# Altium PCB Sinistro_ASP_RevA.PcbDoc (part 4 of 5)
Units mm, origin at the board's own origin, x right, y up, seen from the top; angles counter-clockwise.
Board outline 150 x 110 mm, 8 copper layers (Top Layer (.GTL), MidLayer1 (.G1), +28V and VCC (.GP1), A and D grounds (.GP2), Earth GND (.GP3), +5ANA (.GP4), -5ANA (.GP5), Bottom Layer (.GBL)); 383 components, 275 nets, 1751 pads, 521 vias.
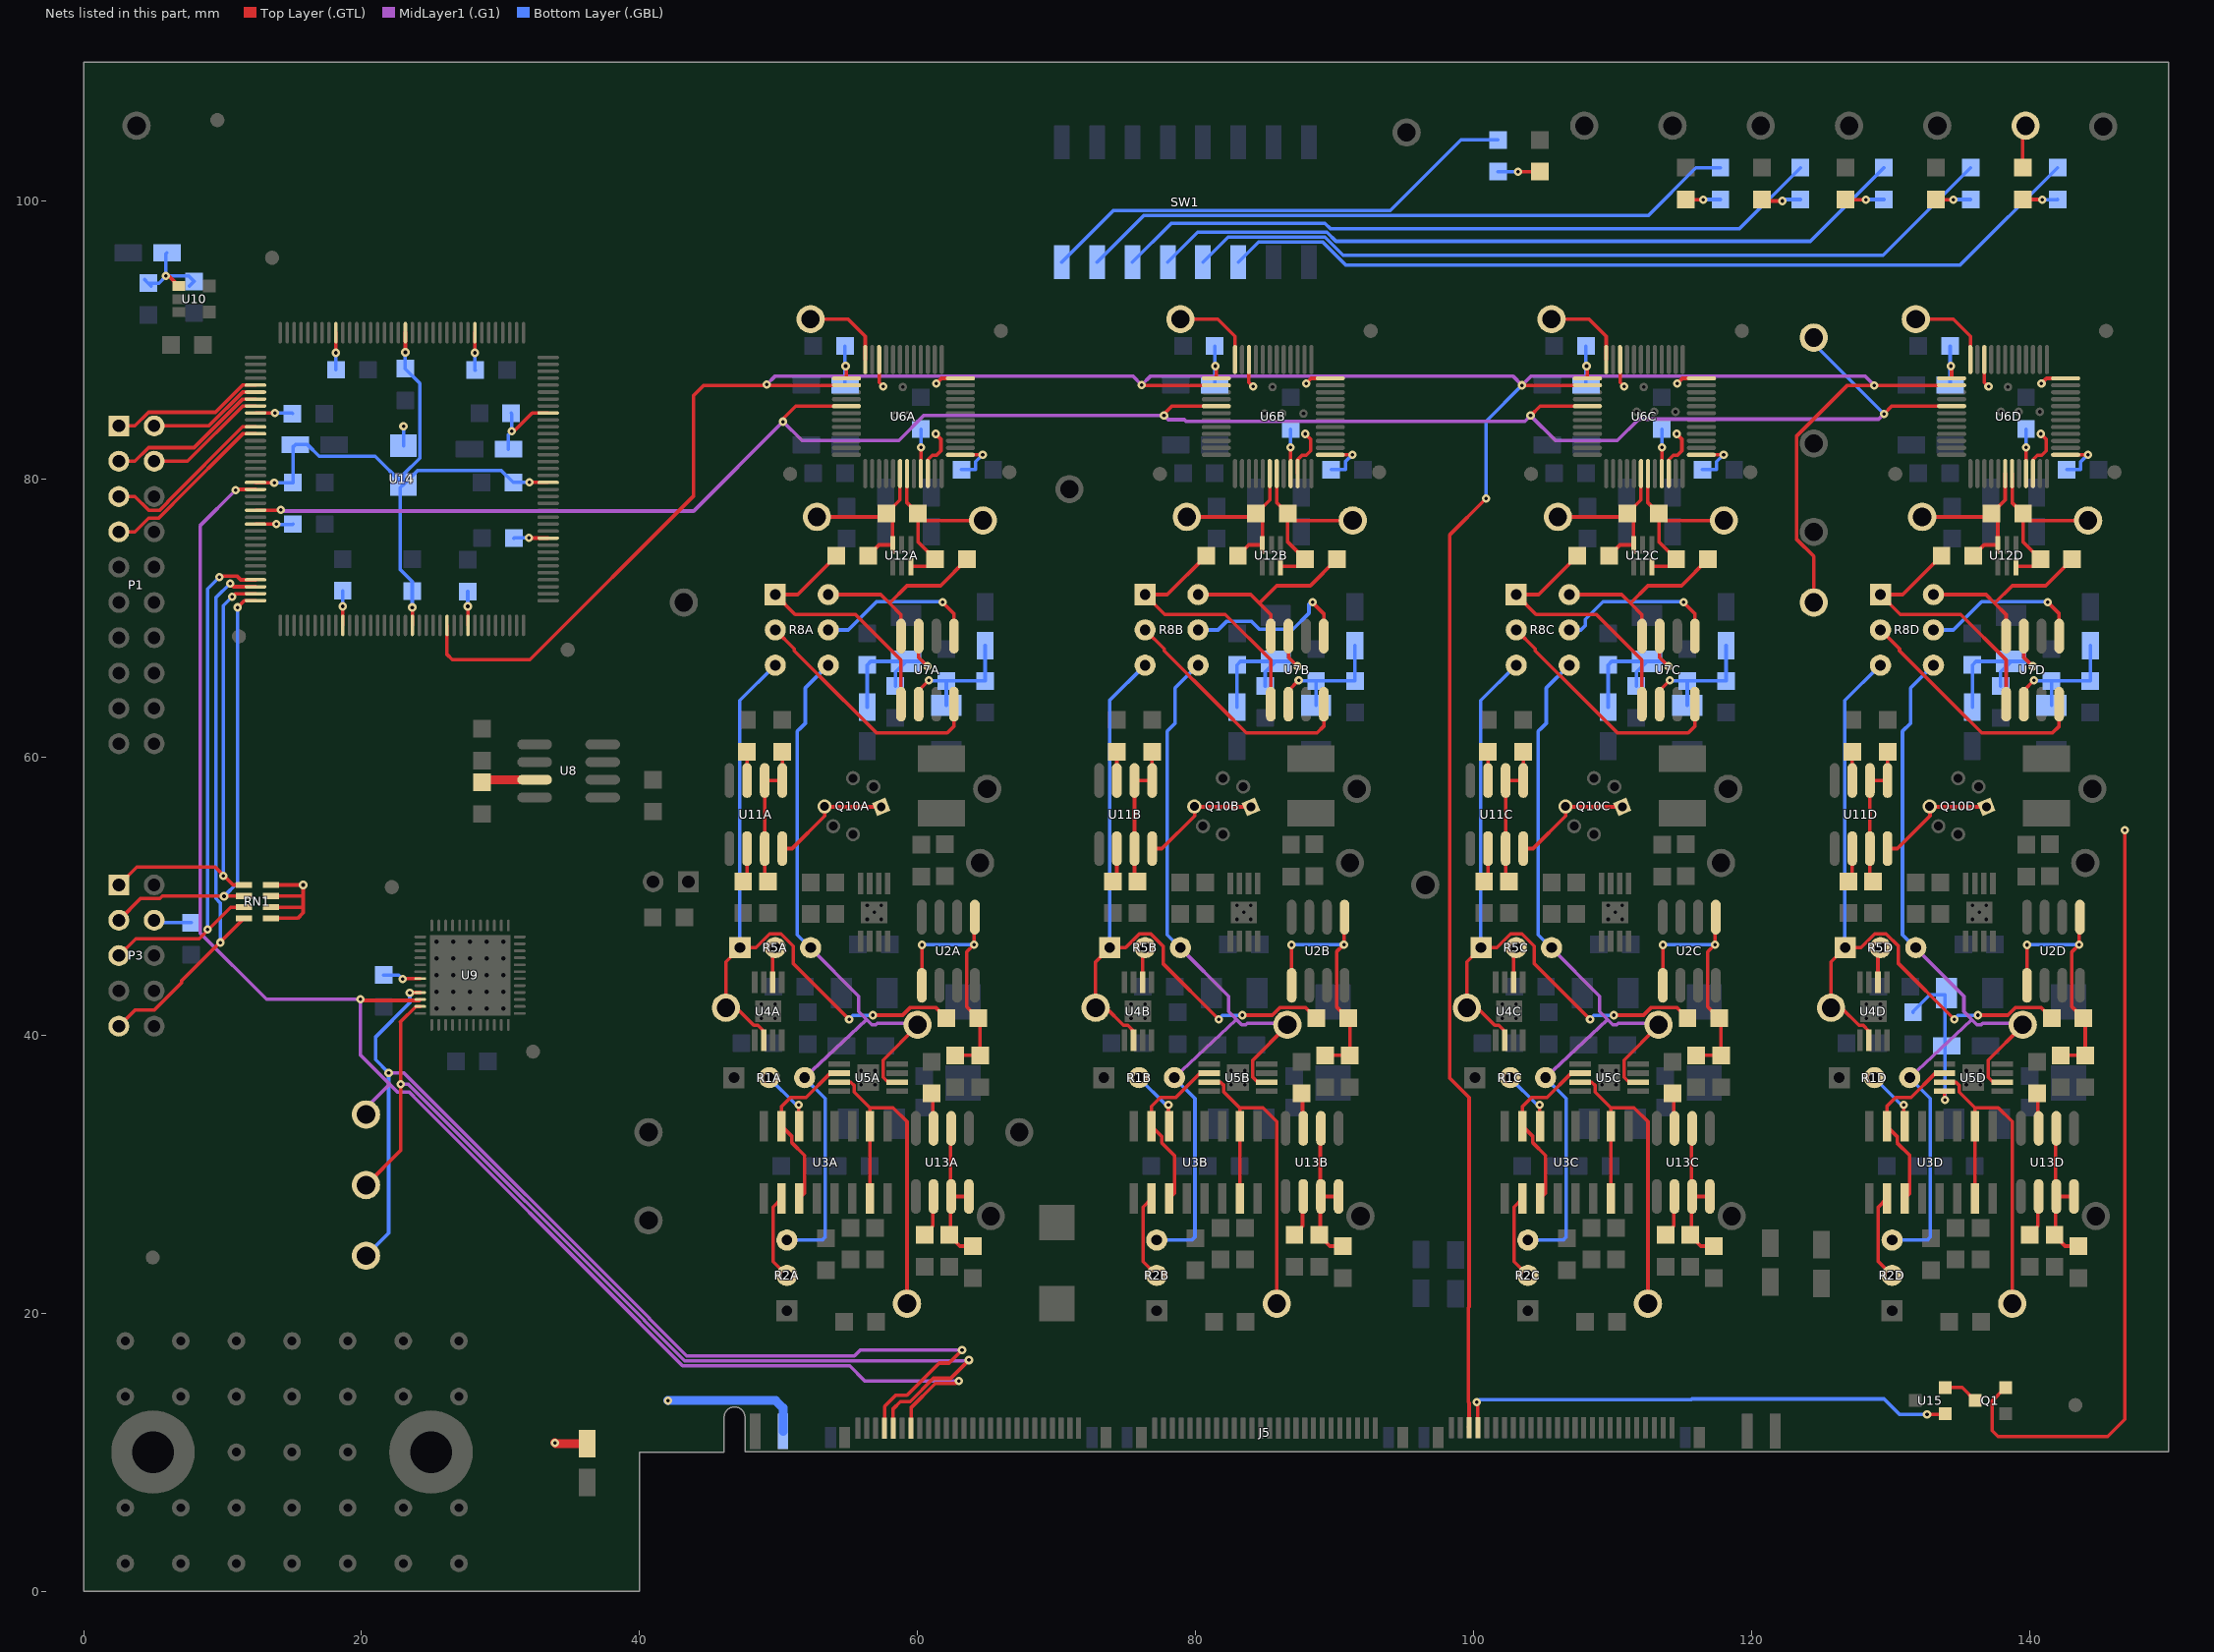
[diagram p10: the nets of this part, all layers, seen from the top]

## Via types
v1: diameter 0.61, hole 0.254, Top Layer (.GTL) to Bottom Layer (.GBL), 521 vias

## Nets (pads, with @x,y where several pads share a name; then routed paths per layer and width w, separated by ;. In a path a pad name is that pad's centre, name@x,y a point inside that pad or via, vN(x,y) a via of type N, cw(c..) or ccw(c..) an arc to the next point about the centre after c; other vN are vias at no path point) (continued)
NetC13D_2: C13D.2 C15D.2 L2D.1 U5D.4 | length 11.1
  Top Layer (.GTL) w0.254: U5D.4@133.866,35.965 133.866,35.383 v1(133.909,35.34)
  Bottom Layer (.GBL) w0.254: C13D.2@131.605,41.632 131.605,41.708 132.798,42.902 133.891,42.902 v1@133.891,35.333
NetC16A_1: C16A.1 C18A.1 C19A.1 L3A.2 U7A.3 | length 12.1
  Top Layer (.GTL) w0.254: U7A.3@60.073,68.701 60.073,67.166 v1(60.708,66.531)
  Bottom Layer (.GBL) w0.254: C16A.1@56.372,63.578 C19A.1@56.372,66.626 56.626,66.88 L3A.2@59.166,66.88 ; C18A.1@58.404,65.102 58.404,66.118 L3A.2@59.166,66.88 ; v1@60.69,66.524 60.334,66.88 L3A.2@59.166,66.88
NetC16B_1: C16B.1 C18B.1 C19B.1 L3B.2 U7B.3 | length 12.1
  Top Layer (.GTL) w0.254: U7B.3@86.673,68.701 86.673,67.166 v1(87.308,66.531)
  Bottom Layer (.GBL) w0.254: C16B.1@82.972,63.578 C19B.1@82.972,66.626 83.226,66.88 L3B.2@85.766,66.88 ; C18B.1@85.004,65.102 85.004,66.118 L3B.2@85.766,66.88 ; v1@87.29,66.524 86.934,66.88 L3B.2@85.766,66.88
NetC16C_1: C16C.1 C18C.1 C19C.1 L3C.2 U7C.3 | length 12.1
  Top Layer (.GTL) w0.254: U7C.3@113.373,68.701 113.373,67.166 v1(114.008,66.531)
  Bottom Layer (.GBL) w0.254: C16C.1@109.672,63.578 C19C.1@109.672,66.626 109.926,66.88 L3C.2@112.466,66.88 ; C18C.1@111.704,65.102 111.704,66.118 L3C.2@112.466,66.88 ; v1@113.99,66.524 113.634,66.88 L3C.2@112.466,66.88
NetC16D_1: C16D.1 C18D.1 C19D.1 L3D.2 U7D.3 | length 12.1
  Top Layer (.GTL) w0.254: U7D.3@139.573,68.701 139.573,67.166 v1(140.208,66.531)
  Bottom Layer (.GBL) w0.254: C16D.1@135.872,63.578 C19D.1@135.872,66.626 136.126,66.88 L3D.2@138.666,66.88 ; C18D.1@137.904,65.102 137.904,66.118 L3D.2@138.666,66.88 ; v1@140.19,66.524 139.834,66.88 L3D.2@138.666,66.88
NetC17A_2: C17A.2 R14A.1 U13A.2 U13A.7 U13A.8 | length 11.1
  Top Layer (.GTL) w0.254: U13A.2@62.359,33.294 U13A.7@62.359,28.394 ; U13A.8@63.629,28.394 U13A.7@62.359,28.394 ; C17A.2@63.985,24.824 63.045,24.824 62.232,25.637 62.359,25.764 U13A.7@62.359,28.394
NetC17B_2: C17B.2 R14B.1 U13B.2 U13B.7 U13B.8 | length 11.1
  Top Layer (.GTL) w0.254: U13B.2@88.959,33.294 U13B.7@88.959,28.394 ; U13B.8@90.229,28.394 U13B.7@88.959,28.394 ; C17B.2@90.585,24.824 89.645,24.824 88.832,25.637 88.959,25.764 U13B.7@88.959,28.394
NetC17C_2: C17C.2 R14C.1 U13C.2 U13C.7 U13C.8 | length 11.1
  Top Layer (.GTL) w0.254: U13C.2@115.659,33.294 U13C.7@115.659,28.394 ; U13C.8@116.929,28.394 U13C.7@115.659,28.394 ; C17C.2@117.285,24.824 116.345,24.824 115.532,25.637 115.659,25.764 U13C.7@115.659,28.394
NetC17D_2: C17D.2 R14D.1 U13D.2 U13D.7 U13D.8 | length 11.1
  Top Layer (.GTL) w0.254: U13D.2@141.859,33.294 U13D.7@141.859,28.394 ; U13D.8@143.129,28.394 U13D.7@141.859,28.394 ; C17D.2@143.485,24.824 142.545,24.824 141.732,25.637 141.859,25.764 U13D.7@141.859,28.394
NetC22A_2: C22A.2 U6A.9 | length 3.2
  Top Layer (.GTL) w0.254: U6A.9@60.231,80.389 v1(60.231,82.284)
  Bottom Layer (.GBL) w0.254: v1@60.213,82.277 60.233,82.297 C22A.2@60.233,83.593
NetC22B_2: C22B.2 U6B.9 | length 3.2
  Top Layer (.GTL) w0.254: U6B.9@86.831,80.389 v1(86.831,82.284)
  Bottom Layer (.GBL) w0.254: v1@86.813,82.277 86.833,82.297 C22B.2@86.833,83.593
NetC22C_2: C22C.2 U6C.9 | length 3.2
  Top Layer (.GTL) w0.254: U6C.9@113.531,80.389 v1(113.531,82.284)
  Bottom Layer (.GBL) w0.254: v1@113.513,82.277 113.533,82.297 C22C.2@113.533,83.593
NetC22D_2: C22D.2 U6D.9 | length 3.2
  Top Layer (.GTL) w0.254: U6D.9@139.731,80.389 v1(139.731,82.284)
  Bottom Layer (.GBL) w0.254: v1@139.713,82.277 139.733,82.297 C22D.2@139.733,83.593
NetC23A_2: C23A.2 U6A.13 | length 4.4
  Top Layer (.GTL) w0.254: U6A.13@63.081,81.739 v1(64.678,81.739)
  Bottom Layer (.GBL) w0.254: C23A.2@63.636,80.672 C23A.2@63.154,80.672 64.17,80.672 64.17,81.242 v1@64.659,81.732
NetC23B_2: C23B.2 U6B.13 | length 4.4
  Top Layer (.GTL) w0.254: U6B.13@89.681,81.739 v1(91.278,81.739)
  Bottom Layer (.GBL) w0.254: C23B.2@90.236,80.672 C23B.2@89.754,80.672 90.77,80.672 90.77,81.242 v1@91.259,81.732
NetC23C_2: C23C.2 U6C.13 | length 4.4
  Top Layer (.GTL) w0.254: U6C.13@116.381,81.739 v1(117.978,81.739)
  Bottom Layer (.GBL) w0.254: C23C.2@116.936,80.672 C23C.2@116.454,80.672 117.47,80.672 117.47,81.242 v1@117.959,81.732
NetC23D_2: C23D.2 U6D.13 | length 4.4
  Top Layer (.GTL) w0.254: U6D.13@142.581,81.739 v1(144.178,81.739)
  Bottom Layer (.GBL) w0.254: C23D.2@143.136,80.672 C23D.2@142.654,80.672 143.67,80.672 143.67,81.242 v1@144.159,81.732
NetC26A_1: C26A.1 C28A.1 C31A.2 L4A.2 U7A.6 | length 10.4
  Top Layer (.GTL) w0.254: U7A.6@60.073,63.801 60.073,64.778 v1(60.81,65.515)
  Bottom Layer (.GBL) w0.254: v1@60.791,65.508 60.817,65.483 C28A.1@62.061,65.483 ; L4A.2@62.061,63.705 C28A.1@62.061,65.483 ; C31A.2@64.855,68.023 C26A.1@64.855,65.483 C28A.1@62.061,65.483
NetC26B_1: C26B.1 C28B.1 C31B.2 L4B.2 U7B.6 | length 10.4
  Top Layer (.GTL) w0.254: U7B.6@86.673,63.801 86.673,64.778 v1(87.41,65.515)
  Bottom Layer (.GBL) w0.254: v1@87.391,65.508 87.417,65.483 C28B.1@88.661,65.483 ; L4B.2@88.661,63.705 C28B.1@88.661,65.483 ; C31B.2@91.455,68.023 C26B.1@91.455,65.483 C28B.1@88.661,65.483
NetC26C_1: C26C.1 C28C.1 C31C.2 L4C.2 U7C.6 | length 10.4
  Top Layer (.GTL) w0.254: U7C.6@113.373,63.801 113.373,64.778 v1(114.11,65.515)
  Bottom Layer (.GBL) w0.254: v1@114.091,65.508 114.117,65.483 C28C.1@115.361,65.483 ; L4C.2@115.361,63.705 C28C.1@115.361,65.483 ; C31C.2@118.155,68.023 C26C.1@118.155,65.483 C28C.1@115.361,65.483
NetC26D_1: C26D.1 C28D.1 C31D.2 L4D.2 U7D.6 | length 10.4
  Top Layer (.GTL) w0.254: U7D.6@139.573,63.801 139.573,64.778 v1(140.31,65.515)
  Bottom Layer (.GBL) w0.254: v1@140.291,65.508 140.317,65.483 C28D.1@141.561,65.483 ; L4D.2@141.561,63.705 C28D.1@141.561,65.483 ; C31D.2@144.355,68.023 C26D.1@144.355,65.483 C28D.1@141.561,65.483
NetC40_2: C40.2 C41.2 C42.2 C43.2 C45.1 L5.1 U14.19 U14.56 U14.90 U14.126 | length 48.1
  Top Layer (.GTL) w0.254: U14.19@12.375,79.75 12.394,79.731 v1(13.716,79.731) ; v1(23.15,89.114) U14.126@23.15,90.525 ; v1(23.647,70.764) 23.65,70.762 U14.56@23.65,69.475 ; v1@32.086,79.75 v1(32.08,79.756) 33.419,79.756 U14.90@33.425,79.75
  Bottom Layer (.GBL) w0.254: v1(13.716,79.731) C40.2@15.062,79.731 15.062,82.296 C45.1@15.24,82.474 16.11,82.474 16.949,81.636 20.98,81.636 L5.1@23.012,79.604 ; v1(23.15,89.114) 23.139,89.103 C41.2@23.139,87.935 24.194,86.881 24.194,81.503 23.012,80.322 L5.1@23.012,79.604 ; v1(23.647,70.764) C42.2@23.647,71.933 23.647,72.625 22.784,73.489 22.784,79.375 L5.1@23.012,79.604 ; v1(32.08,79.756) C43.2@30.912,79.756 30.048,80.62 24.028,80.62 L5.1@23.012,79.604
NetC46A_2: C46A.2 R12A.2 U11A.1 U11A.2 U11A.7 | length 11.8
  Top Layer (.GTL) w0.254: U11A.7@48.999,52.307 U11A.7@48.999,53.413 ; C46A.2@49.228,51.062 48.999,51.291 U11A.7@48.999,53.413 ; R12A.2@50.269,60.384 U11A.1@50.269,58.313 U11A.2@48.999,58.313 U11A.7@48.999,53.413
NetC46B_2: C46B.2 R12B.2 U11B.1 U11B.2 U11B.7 | length 11.8
  Top Layer (.GTL) w0.254: U11B.7@75.599,52.307 U11B.7@75.599,53.413 ; C46B.2@75.828,51.062 75.599,51.291 U11B.7@75.599,53.413 ; R12B.2@76.869,60.384 U11B.1@76.869,58.313 U11B.2@75.599,58.313 U11B.7@75.599,53.413
NetC46C_2: C46C.2 R12C.2 U11C.1 U11C.2 U11C.7 | length 11.8
  Top Layer (.GTL) w0.254: U11C.7@102.299,52.307 U11C.7@102.299,53.413 ; C46C.2@102.528,51.062 102.299,51.291 U11C.7@102.299,53.413 ; R12C.2@103.569,60.384 U11C.1@103.569,58.313 U11C.2@102.299,58.313 U11C.7@102.299,53.413
NetC46D_2: C46D.2 R12D.2 U11D.1 U11D.2 U11D.7 | length 11.8
  Top Layer (.GTL) w0.254: U11D.7@128.499,52.307 U11D.7@128.499,53.413 ; C46D.2@128.728,51.062 128.499,51.291 U11D.7@128.499,53.413 ; R12D.2@129.769,60.384 U11D.1@129.769,58.313 U11D.2@128.499,58.313 U11D.7@128.499,53.413
NetC49A_1: C49A.1 R18A.2 TP6A.1 U6A.6 U12A.6 | length 12.9
  Top Layer (.GTL) w0.254: TP6A.1@52.758,77.275 57.508,77.275 C49A.1@57.737,77.504 ; R18A.2@56.441,74.481 57.216,75.256 U12A.6@58.204,75.256 58.204,77.036 C49A.1@57.737,77.504 ; U6A.6@58.731,80.389 58.731,78.498 C49A.1@57.737,77.504
NetC49A_2: C49A.2 R19A.2 TP7A.1 U6A.7 U12A.3 | length 13.9
  Top Layer (.GTL) w0.254: U6A.7@59.231,80.389 59.231,78.295 C49A.2@60.023,77.504 ; U12A.3@59.504,73.706 60.746,73.706 R19A.2@61.267,74.227 60.023,75.472 C49A.2@60.023,77.504 ; TP7A.1@64.696,77.021 60.505,77.021 C49A.2@60.023,77.504
NetC49B_1: C49B.1 R18B.2 TP6B.1 U6B.6 U12B.6 | length 12.9
  Top Layer (.GTL) w0.254: TP6B.1@79.358,77.275 84.108,77.275 C49B.1@84.337,77.504 ; R18B.2@83.041,74.481 83.816,75.256 U12B.6@84.804,75.256 84.804,77.036 C49B.1@84.337,77.504 ; U6B.6@85.331,80.389 85.331,78.498 C49B.1@84.337,77.504
NetC49B_2: C49B.2 R19B.2 TP7B.1 U6B.7 U12B.3 | length 13.9
  Top Layer (.GTL) w0.254: U6B.7@85.831,80.389 85.831,78.295 C49B.2@86.623,77.504 ; U12B.3@86.104,73.706 87.346,73.706 R19B.2@87.867,74.227 86.623,75.472 C49B.2@86.623,77.504 ; TP7B.1@91.296,77.021 87.105,77.021 C49B.2@86.623,77.504
NetC49C_1: C49C.1 R18C.2 TP6C.1 U6C.6 U12C.6 | length 12.9
  Top Layer (.GTL) w0.254: TP6C.1@106.058,77.275 110.808,77.275 C49C.1@111.037,77.504 ; R18C.2@109.741,74.481 110.516,75.256 U12C.6@111.504,75.256 111.504,77.036 C49C.1@111.037,77.504 ; U6C.6@112.031,80.389 112.031,78.498 C49C.1@111.037,77.504
NetC49C_2: C49C.2 R19C.2 TP7C.1 U6C.7 U12C.3 | length 13.9
  Top Layer (.GTL) w0.254: U6C.7@112.531,80.389 112.531,78.295 C49C.2@113.323,77.504 ; U12C.3@112.804,73.706 114.046,73.706 R19C.2@114.567,74.227 113.323,75.472 C49C.2@113.323,77.504 ; TP7C.1@117.996,77.021 113.805,77.021 C49C.2@113.323,77.504
NetC49D_1: C49D.1 R18D.2 TP6D.1 U6D.6 U12D.6 | length 12.9
  Top Layer (.GTL) w0.254: TP6D.1@132.258,77.275 137.008,77.275 C49D.1@137.237,77.504 ; R18D.2@135.941,74.481 136.716,75.256 U12D.6@137.704,75.256 137.704,77.036 C49D.1@137.237,77.504 ; U6D.6@138.231,80.389 138.231,78.498 C49D.1@137.237,77.504
NetC49D_2: C49D.2 R19D.2 TP7D.1 U6D.7 U12D.3 | length 13.9
  Top Layer (.GTL) w0.254: U6D.7@138.731,80.389 138.731,78.295 C49D.2@139.523,77.504 ; U12D.3@139.004,73.706 140.246,73.706 R19D.2@140.767,74.227 139.523,75.472 C49D.2@139.523,77.504 ; TP7D.1@144.196,77.021 140.005,77.021 C49D.2@139.523,77.504
NetC61_2: C61.2 U8.3 | length 3.8
  Top Layer (.GTL) w0.635: C61.2@28.677,58.191 28.854,58.369 U8.3@32.45,58.369
NetD1_ANOD: D1.ANOD R25.2 | length 2.7
  Top Layer (.GTL) w0.254: D1.ANOD@120.857,100 v1(122.2,100)
  Bottom Layer (.GBL) w0.254: v1(122.2,100) 122.307,100.107 R25.2@123.5,100.107
NetD2_ANOD: D2.ANOD R26.2 | length 2.5
  Top Layer (.GTL) w0.254: D2.ANOD@133.257,100.1 v1(134.5,100.1)
  Bottom Layer (.GBL) w0.254: v1(134.5,100.1) 134.507,100.107 R26.2@135.75,100.107
NetD3_CATH: D3.CATH R22.2 | length 3
  Top Layer (.GTL) w0.254: v1(103.2,102.1) 103.207,102.107 D3.CATH@104.75,102.107
  Bottom Layer (.GBL) w0.254: R22.2@101.75,102.107 103.193,102.107 v1(103.2,102.1)
NetD4_CATH: D4.CATH R23.2 | length 2.5
  Top Layer (.GTL) w0.254: D4.CATH@115.25,100.107 115.257,100.1 v1(116.5,100.1)
  Bottom Layer (.GBL) w0.254: v1(116.5,100.1) 116.507,100.107 R23.2@117.75,100.107
NetD5_CATH: D5.CATH R24.2 | length 2.7
  Top Layer (.GTL) w0.254: D5.CATH@126.757,100.1 v1(128.2,100.1)
  Bottom Layer (.GBL) w0.254: v1(128.2,100.1) 128.207,100.107 R24.2@129.5,100.107
NetD6_CATH: D6.CATH R27.2 | length 2.5
  Top Layer (.GTL) w0.254: D6.CATH@139.5,100.107 140.893,100.107 v1(140.9,100.1)
  Bottom Layer (.GBL) w0.254: v1(140.9,100.1) 141.993,100.1 R27.2@142,100.107
NetQ1_3: Q1.3 U15.2 | length 2.5
  Top Layer (.GTL) w0.254: U15.2@133.934,14.656 135.128,14.656 Q1.3@136.068,13.716
NetQ10A_1: Q10A.1 Q10A.5 U11A.8 | length 8.8
  Top Layer (.GTL) w0.254: U11A.8@50.318,53.413 U11A.8@50.269,53.413 50.969,53.413 53.327,55.771 53.327,56.422 Q10A.1@57.381,56.422
NetQ10B_1: Q10B.1 Q10B.5 U11B.8 | length 8.8
  Top Layer (.GTL) w0.254: U11B.8@76.918,53.413 U11B.8@76.869,53.413 77.569,53.413 79.927,55.771 79.927,56.422 Q10B.1@83.981,56.422
NetQ10C_1: Q10C.1 Q10C.5 U11C.8 | length 8.8
  Top Layer (.GTL) w0.254: U11C.8@103.618,53.413 U11C.8@103.569,53.413 104.269,53.413 106.627,55.771 106.627,56.422 Q10C.1@110.681,56.422
NetQ10D_1: Q10D.1 Q10D.5 U11D.8 | length 8.8
  Top Layer (.GTL) w0.254: U11D.8@129.818,53.413 U11D.8@129.769,53.413 130.469,53.413 132.827,55.771 132.827,56.422 Q10D.1@136.881,56.422
NetR1A_2: R1A.2 U3A.6 | length 4.4
  Top Layer (.GTL) w0.254: U3A.6@51.437,33.495 v1(51.437,34.984)
  Bottom Layer (.GBL) w0.254: R1A.2@49.311,36.933 51.266,34.977 v1@51.419,34.977
NetR1A_3: R1A.3 R2A.3 R5A.3 R8A.4 TP3A.1 U5A.6 | length 59.4
  Top Layer (.GTL) w0.254: U5A.6@58.516,36.615 57.868,36.615 57.513,36.97 57.513,38.209 59.997,40.694 TP3A.1@59.997,40.75
  MidLayer1 (.G1) w0.254: R1A.3@51.851,36.933 56.3,41.1 ; R5A.3@52.282,46.28 55.762,42.8 55.762,41.69 56.71,40.743 57.001,40.743 57.109,40.851 59.87,40.851 TP3A.1@59.979,40.743
  Bottom Layer (.GBL) w0.254: R2A.3@50.581,25.249 53.121,25.249 53.349,25.478 53.349,35.434 R1A.3@51.851,36.933 ; R5A.3@52.282,46.28 51.343,47.22 51.343,61.858 51.596,62.111 51.608,62.111 51.92,62.424 51.92,64.968 R8A.4@53.552,66.6
  other v1: 53.571,66.607
NetR1B_2: R1B.2 U3B.6 | length 4.4
  Top Layer (.GTL) w0.254: U3B.6@78.037,33.495 v1(78.037,34.984)
  Bottom Layer (.GBL) w0.254: R1B.2@75.911,36.933 77.866,34.977 v1@78.019,34.977
NetR1B_3: R1B.3 R2B.3 R5B.3 R8B.4 TP3B.1 U5B.6 | length 59.4
  Top Layer (.GTL) w0.254: U5B.6@85.116,36.615 84.468,36.615 84.113,36.97 84.113,38.209 86.597,40.694 TP3B.1@86.597,40.75
  MidLayer1 (.G1) w0.254: R1B.3@78.451,36.933 82.9,41.1 ; R5B.3@78.882,46.28 82.362,42.8 82.362,41.69 83.31,40.743 83.601,40.743 83.709,40.851 86.47,40.851 TP3B.1@86.579,40.743
  Bottom Layer (.GBL) w0.254: R2B.3@77.181,25.249 79.721,25.249 79.949,25.478 79.949,35.434 R1B.3@78.451,36.933 ; R5B.3@78.882,46.28 77.943,47.22 77.943,61.858 78.196,62.111 78.208,62.111 78.52,62.424 78.52,64.968 R8B.4@80.152,66.6
NetR1C_2: R1C.2 U3C.6 | length 4.4
  Top Layer (.GTL) w0.254: U3C.6@104.737,33.495 v1(104.737,34.984)
  Bottom Layer (.GBL) w0.254: R1C.2@102.611,36.933 104.566,34.977 v1@104.719,34.977
NetR1C_3: R1C.3 R2C.3 R5C.3 R8C.4 TP3C.1 U5C.6 | length 59.4
  Top Layer (.GTL) w0.254: U5C.6@111.816,36.615 111.168,36.615 110.813,36.97 110.813,38.209 113.297,40.694 TP3C.1@113.297,40.75
  MidLayer1 (.G1) w0.254: R1C.3@105.151,36.933 109.6,41.1 ; R5C.3@105.582,46.28 109.062,42.8 109.062,41.69 110.01,40.743 110.301,40.743 110.409,40.851 113.17,40.851 TP3C.1@113.279,40.743
  Bottom Layer (.GBL) w0.254: R2C.3@103.881,25.249 106.421,25.249 106.649,25.478 106.649,35.434 R1C.3@105.151,36.933 ; R5C.3@105.582,46.28 104.643,47.22 104.643,61.858 104.896,62.111 104.908,62.111 105.22,62.424 105.22,64.968 R8C.4@106.852,66.6
NetR1D_2: R1D.2 U3D.6 | length 4.4
  Top Layer (.GTL) w0.254: U3D.6@130.937,33.495 v1(130.937,34.984)
  Bottom Layer (.GBL) w0.254: R1D.2@128.811,36.933 130.766,34.977 v1@130.919,34.977
NetR1D_3: R1D.3 R2D.3 R5D.3 R8D.4 TP3D.1 U5D.6 | length 59.4
  Top Layer (.GTL) w0.254: U5D.6@138.016,36.615 137.368,36.615 137.013,36.97 137.013,38.209 139.497,40.694 TP3D.1@139.497,40.75
  MidLayer1 (.G1) w0.254: R1D.3@131.351,36.933 135.8,41.1 ; R5D.3@131.782,46.28 135.262,42.8 135.262,41.69 136.21,40.743 136.501,40.743 136.609,40.851 139.37,40.851 TP3D.1@139.479,40.743
  Bottom Layer (.GBL) w0.254: R2D.3@130.081,25.249 132.621,25.249 132.849,25.478 132.849,35.434 R1D.3@131.351,36.933 ; R5D.3@131.782,46.28 130.843,47.22 130.843,61.858 131.096,62.111 131.108,62.111 131.42,62.424 131.42,64.968 R8D.4@133.052,66.6
NetR2A_2: R2A.2 U3A.10 | length 6.2
  Top Layer (.GTL) w0.254: U3A.10@50.218,28.244 49.609,27.634 49.609,23.706 R2A.2@50.599,22.716
NetR2B_2: R2B.2 U3B.10 | length 6.2
  Top Layer (.GTL) w0.254: U3B.10@76.818,28.244 76.209,27.634 76.209,23.706 R2B.2@77.199,22.716
NetR2C_2: R2C.2 U3C.10 | length 6.2
  Top Layer (.GTL) w0.254: U3C.10@103.518,28.244 102.909,27.634 102.909,23.706 R2C.2@103.899,22.716
NetR2D_2: R2D.2 U3D.10 | length 6.2
  Top Layer (.GTL) w0.254: U3D.10@129.718,28.244 129.109,27.634 129.109,23.706 R2D.2@130.099,22.716
NetR5A_1: R5A.1 R8A.3 R9A.2 TP4A.1 U4A.6 | length 49.4
  Top Layer (.GTL) w0.254: U4A.6@48.928,39.64 48.928,40.288 48.515,40.701 48.213,40.701 46.946,41.969 TP4A.1@46.205,41.969 46.205,45.271 R5A.1@47.221,46.287 48.36,46.287 49.351,47.278 50.171,47.278 51.056,46.393 51.056,45.144 v1(55.07,41.131) ; v1(56.771,41.436) 58.923,41.436 59.482,41.994 61.293,41.994 R9A.2@62.08,41.207
  Bottom Layer (.GBL) w0.254: R5A.1@47.202,46.28 47.202,64.06 R8A.3@49.742,66.6 ; v1@55.051,41.124 55.356,41.429 v1@56.753,41.429
  other v1: 49.761,66.607
NetR5A_2: R5A.2 U4A.2 | length 2.6
  Top Layer (.GTL) w0.254: U4A.2@49.578,43.79 49.578,46.104 R5A.2@49.761,46.287
NetR5B_1: R5B.1 R8B.3 R9B.2 TP4B.1 U4B.6 | length 49.4
  Top Layer (.GTL) w0.254: U4B.6@75.528,39.64 75.528,40.288 75.115,40.701 74.813,40.701 73.546,41.969 TP4B.1@72.805,41.969 72.805,45.271 R5B.1@73.821,46.287 74.96,46.287 75.951,47.278 76.771,47.278 77.656,46.393 77.656,45.144 v1(81.67,41.131) ; v1(83.371,41.436) 85.523,41.436 86.082,41.994 87.893,41.994 R9B.2@88.68,41.207
  Bottom Layer (.GBL) w0.254: R5B.1@73.802,46.28 73.802,64.06 R8B.3@76.342,66.6 ; v1@81.651,41.124 81.956,41.429 v1@83.353,41.429
NetR5B_2: R5B.2 U4B.2 | length 2.6
  Top Layer (.GTL) w0.254: U4B.2@76.178,43.79 76.178,46.104 R5B.2@76.361,46.287
NetR5C_1: R5C.1 R8C.3 R9C.2 TP4C.1 U4C.6 | length 49.4
  Top Layer (.GTL) w0.254: U4C.6@102.228,39.64 102.228,40.288 101.815,40.701 101.513,40.701 100.246,41.969 TP4C.1@99.505,41.969 99.505,45.271 R5C.1@100.521,46.287 101.66,46.287 102.651,47.278 103.471,47.278 104.356,46.393 104.356,45.144 v1(108.37,41.131) ; v1(110.071,41.436) 112.223,41.436 112.782,41.994 114.593,41.994 R9C.2@115.38,41.207
  Bottom Layer (.GBL) w0.254: R5C.1@100.502,46.28 100.502,64.06 R8C.3@103.042,66.6 ; v1@108.351,41.124 108.656,41.429 v1@110.053,41.429
NetR5C_2: R5C.2 U4C.2 | length 2.6
  Top Layer (.GTL) w0.254: U4C.2@102.878,43.79 102.878,46.104 R5C.2@103.061,46.287
NetR5D_1: R5D.1 R8D.3 R9D.2 TP4D.1 U4D.6 | length 49.4
  Top Layer (.GTL) w0.254: U4D.6@128.428,39.64 128.428,40.288 128.015,40.701 127.713,40.701 126.446,41.969 TP4D.1@125.705,41.969 125.705,45.271 R5D.1@126.721,46.287 127.86,46.287 128.851,47.278 129.671,47.278 130.556,46.393 130.556,45.144 v1(134.57,41.131) ; v1(136.271,41.436) 138.423,41.436 138.982,41.994 140.793,41.994 R9D.2@141.58,41.207
  Bottom Layer (.GBL) w0.254: R5D.1@126.702,46.28 126.702,64.06 R8D.3@129.242,66.6 ; v1@134.551,41.124 134.856,41.429 v1@136.253,41.429
NetR5D_2: R5D.2 U4D.2 | length 2.6
  Top Layer (.GTL) w0.254: U4D.2@129.078,43.79 129.078,46.104 R5D.2@129.261,46.287
NetR6A_1: R6A.1 R7A.1 R9A.1 U2A.1 U2A.5 | length 19
  Top Layer (.GTL) w0.254: U2A.5@60.302,43.583 v1(60.302,46.49) ; R6A.1@62.715,38.54 R7A.1@64.493,38.54 64.493,41.08 R9A.1@64.366,41.207 63.533,42.04 63.533,45.988 v1(64.061,46.516) 64.061,48.432 U2A.1@64.112,48.483
  Bottom Layer (.GBL) w0.254: v1@60.283,46.483 60.309,46.509 v1@64.043,46.509
NetR6B_1: R6B.1 R7B.1 R9B.1 U2B.1 U2B.5 | length 19
  Top Layer (.GTL) w0.254: U2B.5@86.902,43.583 v1(86.902,46.49) ; R6B.1@89.315,38.54 R7B.1@91.093,38.54 91.093,41.08 R9B.1@90.966,41.207 90.133,42.04 90.133,45.988 v1(90.661,46.516) 90.661,48.432 U2B.1@90.712,48.483
  Bottom Layer (.GBL) w0.254: v1@86.883,46.483 86.909,46.509 v1@90.643,46.509
NetR6C_1: R6C.1 R7C.1 R9C.1 U2C.1 U2C.5 | length 19
  Top Layer (.GTL) w0.254: U2C.5@113.602,43.583 v1(113.602,46.49) ; R6C.1@116.015,38.54 R7C.1@117.793,38.54 117.793,41.08 R9C.1@117.666,41.207 116.833,42.04 116.833,45.988 v1(117.361,46.516) 117.361,48.432 U2C.1@117.412,48.483
  Bottom Layer (.GBL) w0.254: v1@113.583,46.483 113.609,46.509 v1@117.343,46.509
NetR6D_1: R6D.1 R7D.1 R9D.1 U2D.1 U2D.5 | length 19
  Top Layer (.GTL) w0.254: U2D.5@139.802,43.583 v1(139.802,46.49) ; R6D.1@142.215,38.54 R7D.1@143.993,38.54 143.993,41.08 R9D.1@143.866,41.207 143.033,42.04 143.033,45.988 v1(143.561,46.516) 143.561,48.432 U2D.1@143.612,48.483
  Bottom Layer (.GBL) w0.254: v1@139.783,46.483 139.809,46.509 v1@143.543,46.509
NetR8A_1: R8A.1 R18A.1 U7A.5 | length 19.7
  Top Layer (.GTL) w0.254: R18A.1@54.155,74.481 51.361,71.687 v1(49.761,71.687) 51.183,70.265 55.522,70.265 58.803,66.983 U7A.5@58.803,63.801
NetR8A_2: R8A.2 U7A.8 | length 22.9
  Top Layer (.GTL) w0.254: R8A.2@49.761,69.147 51.133,67.775 51.133,67.644 ; 54.719,64.058 51.133,67.644 ; U7A.8@62.613,63.801 62.613,62.213 62.131,61.73 57.047,61.73 55.252,63.525 51.133,67.644
NetR8A_5: R8A.5 U7A.1 | length 11.9
  Top Layer (.GTL) w0.254: v1(61.801,71.128) 62.613,70.315 U7A.1@62.613,68.701
  Bottom Layer (.GBL) w0.254: R8A.5@53.552,69.14 55.007,69.14 57.039,71.172 61.731,71.172 v1@61.782,71.121
NetR8A_6: R8A.6 R19A.1 U7A.4 | length 14.3
  Top Layer (.GTL) w0.254: v1(53.571,71.687) 57.356,71.687 57.979,71.064 ; U7A.4@58.803,68.701 58.803,70.239 57.979,71.064 ; R19A.1@63.553,74.227 61.648,72.322 59.237,72.322 57.979,71.064
NetR8B_1: R8B.1 R18B.1 U7B.5 | length 19.7
  Top Layer (.GTL) w0.254: R18B.1@80.755,74.481 77.961,71.687 R8B.1@76.361,71.687 77.783,70.265 82.122,70.265 85.403,66.983 U7B.5@85.403,63.801
NetR8B_2: R8B.2 U7B.8 | length 22.9
  Top Layer (.GTL) w0.254: R8B.2@76.361,69.147 77.733,67.775 77.733,67.644 ; 81.319,64.058 77.733,67.644 ; U7B.8@89.213,63.801 89.213,62.213 88.731,61.73 83.647,61.73 81.852,63.525 77.733,67.644
NetR8B_5: R8B.5 U7B.1 | length 12.7
  Top Layer (.GTL) w0.254: v1(88.401,71.128) 89.213,70.315 U7B.1@89.213,68.701
  Bottom Layer (.GBL) w0.254: R8B.5@80.152,69.14 81.607,69.14 82.242,69.775 83.995,69.775 84.579,69.191 86.989,69.191 88.147,70.348 88.147,70.988 88.331,71.172 v1@88.382,71.121
NetR8B_6: R8B.6 R19B.1 U7B.4 | length 14.3
  Top Layer (.GTL) w0.254: R8B.6@80.171,71.687 83.956,71.687 84.579,71.064 ; U7B.4@85.403,68.701 85.403,70.239 84.579,71.064 ; R19B.1@90.153,74.227 88.248,72.322 85.837,72.322 84.579,71.064
NetR8C_1: R8C.1 R18C.1 U7C.5 | length 19.7
  Top Layer (.GTL) w0.254: R18C.1@107.455,74.481 104.661,71.687 R8C.1@103.061,71.687 104.483,70.265 108.822,70.265 112.103,66.983 U7C.5@112.103,63.801
NetR8C_2: R8C.2 U7C.8 | length 22.9
  Top Layer (.GTL) w0.254: R8C.2@103.061,69.147 104.433,67.775 104.433,67.644 ; 108.019,64.058 104.433,67.644 ; U7C.8@115.913,63.801 115.913,62.213 115.431,61.73 110.347,61.73 108.552,63.525 104.433,67.644
NetR8C_5: R8C.5 U7C.1 | length 12.1
  Top Layer (.GTL) w0.254: v1(115.101,71.128) 115.913,70.315 U7C.1@115.913,68.701
  Bottom Layer (.GBL) w0.254: R8C.5@106.852,69.14 107.718,69.14 108.032,69.455 108.032,69.907 109.297,71.172 115.031,71.172 v1@115.082,71.121
NetR8C_6: R8C.6 R19C.1 U7C.4 | length 14.3
  Top Layer (.GTL) w0.254: R8C.6@106.871,71.687 110.656,71.687 111.279,71.064 ; U7C.4@112.103,68.701 112.103,70.239 111.279,71.064 ; R19C.1@116.853,74.227 114.948,72.322 112.537,72.322 111.279,71.064
NetR8D_1: R8D.1 R18D.1 U7D.5 | length 19.7
  Top Layer (.GTL) w0.254: R18D.1@133.655,74.481 130.861,71.687 R8D.1@129.261,71.687 130.683,70.265 135.022,70.265 138.303,66.983 U7D.5@138.303,63.801
NetR8D_2: R8D.2 U7D.8 | length 22.9
  Top Layer (.GTL) w0.254: R8D.2@129.261,69.147 130.633,67.775 130.633,67.644 ; 134.219,64.058 130.633,67.644 ; U7D.8@142.113,63.801 142.113,62.213 141.631,61.73 136.547,61.73 134.752,63.525 130.633,67.644
NetR8D_5: R8D.5 U7D.1 | length 11.9
  Top Layer (.GTL) w0.254: v1(141.301,71.128) 142.113,70.315 U7D.1@142.113,68.701
  Bottom Layer (.GBL) w0.254: R8D.5@133.052,69.14 134.507,69.14 136.539,71.172 141.231,71.172 v1@141.282,71.121
NetR8D_6: R8D.6 R19D.1 U7D.4 | length 14.3
  Top Layer (.GTL) w0.254: R8D.6@133.071,71.687 136.856,71.687 137.479,71.064 ; U7D.4@138.303,68.701 138.303,70.239 137.479,71.064 ; R19D.1@143.053,74.227 141.148,72.322 138.737,72.322 137.479,71.064
NetR15A_1: R15A.1 U11A.3 | length 2.1
  Top Layer (.GTL) w0.254: U11A.3@47.729,58.313 R15A.1@47.729,60.384
NetR15B_1: R15B.1 U11B.3 | length 2.1
  Top Layer (.GTL) w0.254: U11B.3@74.329,58.313 R15B.1@74.329,60.384
NetR15C_1: R15C.1 U11C.3 | length 2.1
  Top Layer (.GTL) w0.254: U11C.3@101.029,58.313 R15C.1@101.029,60.384
NetR15D_1: R15D.1 U11D.3 | length 2.1
  Top Layer (.GTL) w0.254: U11D.3@127.229,58.313 R15D.1@127.229,60.384
NetR16A_1: R16A.1 U11A.6 | length 2.9
  Top Layer (.GTL) w0.254: R16A.1@47.45,51.062 47.729,51.342 U11A.6@47.729,53.413 U11A.6@47.729,52.965
NetR16B_1: R16B.1 U11B.6 | length 2.9
  Top Layer (.GTL) w0.254: R16B.1@74.05,51.062 74.329,51.342 U11B.6@74.329,53.413 U11B.6@74.329,52.965
NetR16C_1: R16C.1 U11C.6 | length 2.9
  Top Layer (.GTL) w0.254: R16C.1@100.75,51.062 101.029,51.342 U11C.6@101.029,53.413 U11C.6@101.029,52.965
NetR16D_1: R16D.1 U11D.6 | length 2.9
  Top Layer (.GTL) w0.254: R16D.1@126.95,51.062 127.229,51.342 U11D.6@127.229,53.413 U11D.6@127.229,52.965
NetR17A_2: R17A.2 U13A.3 | length 2.7
  Top Layer (.GTL) w0.254: U13A.3@60.962,33.421 61.089,33.294 61.089,35.67 R17A.2@60.962,35.797
NetR17B_2: R17B.2 U13B.3 | length 2.7
  Top Layer (.GTL) w0.254: U13B.3@87.562,33.421 87.689,33.294 87.689,35.67 R17B.2@87.562,35.797
NetR17C_2: R17C.2 U13C.3 | length 2.7
  Top Layer (.GTL) w0.254: U13C.3@114.262,33.421 114.389,33.294 114.389,35.67 R17C.2@114.262,35.797
NetR17D_2: R17D.2 U13D.3 | length 2.7
  Top Layer (.GTL) w0.254: U13D.3@140.462,33.421 140.589,33.294 140.589,35.67 R17D.2@140.462,35.797
NetR20A_2: R20A.2 U13A.6 | length 3
  Top Layer (.GTL) w0.254: R20A.2@60.454,25.637 61.089,26.272 U13A.6@61.089,28.394
NetR20B_2: R20B.2 U13B.6 | length 3
  Top Layer (.GTL) w0.254: R20B.2@87.054,25.637 87.689,26.272 U13B.6@87.689,28.394
NetR20C_2: R20C.2 U13C.6 | length 3
  Top Layer (.GTL) w0.254: R20C.2@113.754,25.637 114.389,26.272 U13C.6@114.389,28.394
NetR20D_2: R20D.2 U13D.6 | length 3
  Top Layer (.GTL) w0.254: R20D.2@139.954,25.637 140.589,26.272 U13D.6@140.589,28.394
NetR22_1: R22.1 SW1.8 | length 35
  Bottom Layer (.GBL) w0.254: SW1.8@70.37,95.602 74.09,99.322 89.383,99.322 89.406,99.3 94,99.3 99.093,104.393 R22.1@101.75,104.393
NetR23_1: R23.1 SW1.7 | length 47.7
  Bottom Layer (.GBL) w0.254: SW1.7@72.91,95.602 76.274,98.967 89.236,98.967 89.258,98.944 112.544,98.944 115.993,102.393 R23.1@117.75,102.393
NetR24_1: R24.1 SW1.5 | length 54.9
  Bottom Layer (.GBL) w0.254: SW1.5@77.99,95.602 80.15,97.762 89.435,97.762 90.097,97.1 124.207,97.1 R24.1@129.5,102.393
NetR25_1: R25.1 SW1.6 | length 51.2
  Bottom Layer (.GBL) w0.254: SW1.6@75.45,95.602 78.247,98.4 89.3,98.4 89.7,98 119.107,98 R25.1@123.5,102.393
NetR26_1: R26.1 SW1.4 | length 59.1
  Bottom Layer (.GBL) w0.254: SW1.4@80.53,95.602 82.334,97.406 89.288,97.406 90.594,96.1 129.457,96.1 R26.1@135.75,102.393
NetR27_1: R27.1 SW1.3 | length 63.1
  Bottom Layer (.GBL) w0.254: SW1.3@83.07,95.602 84.518,97.051 89.14,97.051 90.791,95.4 135.007,95.4 R27.1@142,102.393
NetTP5A_1: TP5A.1 U3A.2 U3A.15 U5A.3 | length 25.9
  Top Layer (.GTL) w0.254: U5A.3@54.366,36.615 55.194,36.615 55.428,36.381 55.428,35.9 56.568,34.76 ; U3A.15@56.568,28.244 U3A.2@56.568,33.444 56.568,34.76 ; TP5A.1@59.235,20.684 59.235,33.77 58.233,34.772 57.444,34.772 57.431,34.76 56.568,34.76
NetTP5B_1: TP5B.1 U3B.2 U3B.15 U5B.3 | length 25.9
  Top Layer (.GTL) w0.254: U5B.3@80.966,36.615 81.794,36.615 82.028,36.381 82.028,35.9 83.168,34.76 ; U3B.15@83.168,28.244 U3B.2@83.168,33.444 83.168,34.76 ; TP5B.1@85.835,20.684 85.835,33.77 84.833,34.772 84.044,34.772 84.031,34.76 83.168,34.76
NetTP5C_1: TP5C.1 U3C.2 U3C.15 U5C.3 | length 25.9
  Top Layer (.GTL) w0.254: U5C.3@107.666,36.615 108.494,36.615 108.728,36.381 108.728,35.9 109.868,34.76 ; U3C.15@109.868,28.244 U3C.2@109.868,33.444 109.868,34.76 ; TP5C.1@112.535,20.684 112.535,33.77 111.533,34.772 110.743,34.772 110.731,34.76 109.868,34.76
NetTP5D_1: TP5D.1 U3D.2 U3D.15 U5D.3 | length 25.9
  Top Layer (.GTL) w0.254: U5D.3@133.866,36.615 134.694,36.615 134.928,36.381 134.928,35.9 136.068,34.76 ; U3D.15@136.068,28.244 U3D.2@136.068,33.444 136.068,34.76 ; TP5D.1@138.735,20.684 138.735,33.77 137.733,34.772 136.943,34.772 136.931,34.76 136.068,34.76
NetTP10A_1: TP10A.1 U6A.36 | length 6.1
  Top Layer (.GTL) w0.254: TP10A.1@52.301,91.499 54.993,91.499 56.231,90.261 U6A.36@56.231,88.589
NetTP10B_1: TP10B.1 U6B.36 | length 6.1
  Top Layer (.GTL) w0.254: TP10B.1@78.901,91.499 81.593,91.499 81.986,91.106 82.831,90.261 U6B.36@82.831,88.589
NetTP10C_1: TP10C.1 U6C.36 | length 6.1
  Top Layer (.GTL) w0.254: TP10C.1@105.601,91.499 108.293,91.499 109.531,90.261 U6C.36@109.531,88.589
NetTP10D_1: TP10D.1 U6D.36 | length 6.1
  Top Layer (.GTL) w0.254: TP10D.1@131.801,91.499 134.493,91.499 135.731,90.261 U6D.36@135.731,88.589
NetU3A_7: U3A.7 U3A.11 U5A.2 | length 13.3
  Top Layer (.GTL) w0.254: U3A.11@51.488,28.244 51.869,28.625 ; 51.869,29.303 51.869,28.625 ; U5A.2@54.366,37.265 53.718,37.265 51.97,35.517 50.853,35.517 50.218,34.882 U3A.7@50.218,33.444 50.96,32.702 50.96,32.249 51.869,31.34 51.869,30.661 51.869,28.625
NetU3B_7: U3B.7 U3B.11 U5B.2 | length 13.3
  Top Layer (.GTL) w0.254: U3B.11@78.088,28.244 78.469,28.625 ; 78.469,29.303 78.469,28.625 ; U5B.2@80.966,37.265 80.318,37.265 78.571,35.517 77.453,35.517 76.818,34.882 U3B.7@76.818,33.444 77.56,32.702 77.56,32.249 78.469,31.34 78.469,30.661 78.469,28.625
NetU3C_7: U3C.7 U3C.11 U5C.2 | length 13.3
  Top Layer (.GTL) w0.254: U3C.11@104.788,28.244 105.169,28.625 ; 105.169,29.303 105.169,28.625 ; U5C.2@107.666,37.265 107.018,37.265 105.271,35.517 104.153,35.517 103.518,34.882 U3C.7@103.518,33.444 104.26,32.702 104.26,32.249 105.169,31.34 105.169,30.661 105.169,28.625
NetU3D_7: U3D.7 U3D.11 U5D.2 | length 13.3
  Top Layer (.GTL) w0.254: U3D.11@130.988,28.244 131.369,28.625 ; 131.369,29.303 131.369,28.625 ; U5D.2@133.866,37.265 133.218,37.265 131.471,35.517 130.353,35.517 129.718,34.882 U3D.7@129.718,33.444 130.46,32.702 130.46,32.249 131.369,31.34 131.369,30.661 131.369,28.625
Q0: P1.2 U14.6 | length 8.3
  Top Layer (.GTL) w0.254: P1.2@5.08,83.82 9.016,83.82 11.446,86.25 U14.6@12.375,86.25
Q1: P1.4 U14.8 | length 8.9
  Top Layer (.GTL) w0.254: P1.4@5.08,81.28 7.482,81.28 11.452,85.25 U14.8@12.375,85.25
RD_N: TP24.1 U6A.41 U6B.41 U6C.41 U6D.41 U14.23 | length 149.3
  Top Layer (.GTL) w0.254: U14.23@12.375,77.75 14.174,77.75 v1(14.199,77.775) ; v1(50.317,84.125) 50.317,84.324 51.232,85.239 U6A.41@54.881,85.239 ; v1(77.724,84.582) 77.724,84.68 78.283,85.239 U6B.41@81.481,85.239 ; v1(104.089,84.559) 104.769,85.239 U6C.41@108.181,85.239 ; v1(129.515,84.684) 130.07,85.239 U6D.41@134.381,85.239
  MidLayer1 (.G1) w0.254: v1(14.199,77.775) 14.275,77.699 43.891,77.699 v1(50.317,84.125) 51.681,82.761 58.643,82.761 60.464,84.582 v1(77.724,84.582) 78.034,84.272 79.185,84.272 79.307,84.15 103.681,84.15 v1(104.089,84.559) 105.887,82.761 110.334,82.761 111.875,84.303 129.134,84.303 v1(129.515,84.684)
  Bottom Layer (.GBL) w0.254: TP24.1@124.46,90.17 124.46,89.738 v1(129.515,84.684)
RESET_N: J5.47 TP19.1 U6A.38 U6B.38 U6C.38 U6D.38 U14.61 | length 237.7
  Top Layer (.GTL) w0.254: U14.61@26.15,69.475 26.15,67.373 26.518,67.005 32.106,67.005 43.891,78.791 43.891,86.018 44.612,86.739 U6A.38@54.881,86.739 ; v1@76.124,86.739 U6B.38@81.481,86.739 ; J5.47@99.607,11.817 J5.47@99.667,11.756 99.667,13.541 99.607,13.601 99.607,20.397 99.667,20.457 99.667,35.514 98.26,36.921 98.26,75.959 v1(100.889,78.588) ; v1@103.48,86.739 U6C.38@108.181,86.739 ; TP19.1@124.46,71.12 124.46,74.44 123.215,75.684 123.215,83.066 126.888,86.739 v1(128.803,86.739) U6D.38@134.381,86.739
  MidLayer1 (.G1) w0.254: v1(49.149,86.792) 49.767,87.41 75.481,87.41 v1(76.124,86.766) 76.767,87.41 102.811,87.41 v1(103.48,86.741) 104.148,87.41 128.132,87.41 v1(128.803,86.739)
  Bottom Layer (.GBL) w0.254: v1(100.889,78.588) 100.889,84.15 v1(103.48,86.741)
S_WIRED_1: J5.45 U15.1 | length 36.1
  Top Layer (.GTL) w0.254: v1(100.228,13.589) 100.302,13.515 J5.45@100.302,11.756 ; v1(132.613,12.725) 133.883,12.725 U15.1@133.934,12.776
  Bottom Layer (.GBL) w0.254: v1(100.228,13.589) 100.406,13.767 115.651,13.767 115.715,13.83 129.527,13.83 130.632,12.725 v1(132.613,12.725)
SCLK: J5.143 TP11.1 U9.10 U14.20 | length 117.6
  Top Layer (.GTL) w0.254: v1(10.947,79.197) 11,79.25 U14.20@12.375,79.25 ; v1(19.914,42.57) 19.99,42.494 24.159,42.494 U9.10@24.225,42.56 ; J5.143@59.523,11.729 59.523,13.198 61.26,14.935 62.763,14.935 v1(62.96,15.132)
  MidLayer1 (.G1) w0.254: v1(10.947,79.197) 8.382,76.632 8.382,47.353 13.165,42.57 v1(19.914,42.57) 19.914,38.565 22.018,36.46 ; TP11.1@20.32,34.29 20.32,34.762 22.018,36.46 ; 62.078,15.138 62.084,15.132 ; v1(62.96,15.132) 62.084,15.132 ; 22.018,36.46 22.563,35.916 23.41,35.916 24.126,35.2 39.98,19.347 39.98,19.314 43.089,16.205 55.113,16.205 56.186,15.132 62.084,15.132
SEL0: P1.1 U14.5 | length 11
  Top Layer (.GTL) w0.254: P1.1@2.54,83.82 3.696,83.82 4.675,84.799 9.492,84.799 11.443,86.75 U14.5@12.375,86.75
SEL1: P1.3 U14.7 | length 11.7
  Top Layer (.GTL) w0.254: P1.3@2.54,81.28 3.696,81.28 4.675,82.259 7.957,82.259 11.449,85.75 U14.7@12.375,85.75
SEL2: P1.5 U14.11 | length 12.7
  Top Layer (.GTL) w0.254: P1.5@2.54,78.74 3.696,78.74 4.675,77.761 5.485,77.761 6.059,78.335 6.059,78.365 11.443,83.75 U14.11@12.375,83.75
SIMO: J5.147 TP12.1 U9.11 | length 72.1
  Top Layer (.GTL) w0.254: v1(20.32,29.21) 22.822,31.712 v1(22.822,36.462) 22.822,40.932 22.796,40.957 23.899,42.06 U9.11@24.225,42.06 ; J5.147@58.253,11.729 58.242,11.74 58.242,13.124 58.758,13.64 59.461,13.64 61.138,15.316 62.382,15.316 v1(63.691,16.624)
  MidLayer1 (.G1) w0.254: v1(22.822,36.462) 23.368,36.462 40.335,19.494 40.335,19.462 43.236,16.561 63.627,16.561 v1(63.691,16.624)
SOMI: J5.149 TP13.1 U9.9 | length 80.5
  Top Layer (.GTL) w0.254: v1(23.47,43.028) 23.502,43.06 U9.9@24.225,43.06 ; J5.149@57.618,11.729 57.618,13.295 58.42,14.097 59.233,14.097 61.544,16.408 62.255,16.408 v1(63.195,17.348)
  MidLayer1 (.G1) w0.254: v1(21.946,37.287) 23.045,37.287 40.691,19.642 40.691,19.609 43.383,16.916 55.448,16.916 55.88,17.348 v1(63.195,17.348)
  Bottom Layer (.GBL) w0.254: TP13.1@20.32,24.13 21.946,25.756 v1(21.946,37.287) 21.006,38.227 21.006,39.878 21.024,39.878 23.47,42.323 v1(23.47,43.028)
START_ACQ: P1.7 U14.12 | length 12.8
  Top Layer (.GTL) w0.254: P1.7@2.54,76.2 3.696,76.2 4.675,77.179 5.405,77.179 6.414,78.187 6.414,78.218 11.446,83.25 U14.12@12.375,83.25
TCK: P3.1 RN1.1 U14.35 | length 32.2
  Top Layer (.GTL) w0.254: P3.1@2.54,50.8 3.835,52.095 9.474,52.095 10.77,50.8 RN1.1@11.53,50.8 ; v1(10.693,71.526) 10.917,71.75 U14.35@12.375,71.75
  Bottom Layer (.GBL) w0.254: v1(10.058,51.46) 10.058,70.891 v1(10.693,71.526)
TDI: P3.9 RN1.7 U14.34 | length 40.6
  Top Layer (.GTL) w0.254: P3.9@2.54,40.64 3.708,41.808 5.092,41.808 7.061,43.777 7.061,43.931 RN1.7@11.53,48.4 ; v1(10.541,72.492) 10.783,72.25 U14.34@12.375,72.25
  Bottom Layer (.GBL) w0.254: v1(9.83,46.66) 9.83,49.512 9.525,49.817 9.525,71.476 v1(10.541,72.492)
TDO: P3.3 RN1.3 U14.36 | length 32.4
  Top Layer (.GTL) w0.254: P3.3@2.54,48.26 4.101,49.821 5.485,49.821 5.664,50 RN1.3@11.53,50 ; v1(11.074,70.764) 11.56,71.25 U14.36@12.375,71.25
  Bottom Layer (.GBL) w0.254: v1(10.109,49.987) 11.074,50.952 v1(11.074,70.764)
TMS: P3.5 RN1.5 U14.33 | length 38.9
  Top Layer (.GTL) w0.254: P3.5@2.54,45.72 3.759,46.939 8.331,46.939 10.592,49.2 RN1.5@11.53,49.2 ; v1(9.779,72.949) 9.855,73.025 11.032,73.025 11.307,72.75 U14.33@12.375,72.75
  Bottom Layer (.GBL) w0.254: v1(8.915,47.6) 8.915,72.085 v1(9.779,72.949)
VCC: C2.2 C27.2 C29A.2 C29B.2 C29C.2 C29D.2 C30A.1 C30B.1 C30C.1 C30D.1 C32.1 C33.2 C34.2 C36.2 C37.2 C38.2 C39.2 C44.1 C47.2 C50.2 C51.2 C52.2 C55.1 D6.ANOD J5.PC06 L5.2 P3.4 Q1.2 RN1.2 RN1.4 RN1.6 RN1.8 TP29.1 U6A.10 U6A.24 U6A.34 U6A.37 U6B.10 U6B.24 U6B.34 U6B.37 U6C.10 U6C.24 U6C.34 U6C.37 U6D.10 U6D.24 U6D.34 U6D.37 U9.7 U10.1 U14.9 U14.25 U14.46 U14.64 U14.82 U14.100 U14.116 U14.136 | length 170.9
  Top Layer (.GTL) w0.254: v1(5.922,94.596) 6.151,94.596 U10.1@6.862,93.885 ; U14.25@12.375,76.75 v1(13.877,76.75) ; U14.9@12.375,84.75 12.391,84.734 v1(13.767,84.734) ; RN1.8@13.48,48.4 15.405,48.4 15.799,48.793 15.799,49.174 ; RN1.6@13.48,49.2 15.773,49.2 15.799,49.174 ; RN1.4@13.48,50 15.786,50 15.799,49.987 ; RN1.2@13.48,50.8 v1(15.799,50.8) 15.799,49.987 ; v1@18.15,89.038 U14.136@18.15,90.525 ; v1(18.644,70.841) 18.65,70.834 U14.46@18.65,69.475 ; v1(22.962,44.044) 22.978,44.06 U9.7@24.225,44.06 ; v1(27.635,70.841) 27.65,70.826 U14.64@27.65,69.475 ; v1(28.143,89.078) 28.15,89.085 U14.116@28.15,90.525 ; v1(30.81,83.439) 30.963,83.439 32.274,84.75 U14.100@33.425,84.75 ; v1(32.029,75.768) 32.048,75.75 U14.82@33.425,75.75 ; v1(54.816,88.121) 54.881,88.055 U6A.37@54.881,87.239 ; U6A.34@57.231,87.581 U6A.34@57.231,88.589 57.231,86.95 v1(57.533,86.648) ; U6A.10@60.731,80.389 60.731,81.396 61.053,81.718 61.359,81.718 61.674,82.032 61.674,82.863 v1(61.293,83.244) ; v1(61.343,86.876) 61.706,87.239 U6A.24@63.081,87.239 ; v1(81.416,88.121) 81.481,88.055 U6B.37@81.481,87.239 ; U6B.34@83.831,87.581 U6B.34@83.831,88.589 83.831,86.95 v1(84.133,86.648) ; U6B.10@87.331,80.389 87.331,81.396 87.653,81.718 87.959,81.718 88.274,82.032 88.274,82.863 v1(87.893,83.244) ; v1(87.943,86.876) 88.306,87.239 U6B.24@89.681,87.239 ; v1(108.116,88.121) 108.181,88.055 U6C.37@108.181,87.239 ; U6C.34@110.531,87.581 U6C.34@110.531,88.589 110.531,86.95 v1(110.833,86.648) ; U6C.10@114.031,80.389 114.031,81.396 114.353,81.718 114.659,81.718 114.974,82.032 114.974,82.863 v1(114.593,83.244) ; v1(114.643,86.876) 115.006,87.239 U6C.24@116.381,87.239 ; v1(134.316,88.121) 134.381,88.055 U6D.37@134.381,87.239 ; U6D.34@136.731,87.581 U6D.34@136.731,88.589 136.731,86.95 v1(137.033,86.648) ; Q1.2@138.252,14.656 137.287,13.691 137.287,11.557 137.719,11.125 145.593,11.125 146.837,12.37 v1(146.837,54.737) ; D6.ANOD@139.5,102.393 139.5,105.21 TP29.1@139.7,105.41 ; U6D.10@140.231,80.389 140.231,81.396 140.553,81.718 140.859,81.718 141.174,82.032 141.174,82.863 v1(140.793,83.244) ; v1(140.843,86.876) 141.206,87.239 U6D.24@142.581,87.239 ; 15.799,49.174 15.799,49.987
  Top Layer (.GTL) w0.635: v1(33.909,10.668) 33.96,10.617 C55.1@36.22,10.617
  Bottom Layer (.GBL) w0.254: C27.2@4.398,94.342 C27.2@4.652,94.088 ; C27.2@4.855,93.885 C27.2@4.652,94.088 ; P3.4@5.08,48.26 5.258,48.082 C33.2@7.747,48.082 ; C32.1@5.994,96.266 5.922,96.194 v1(5.922,94.596) ; C2.2@7.624,93.885 C2.2@7.954,94.215 7.573,94.596 v1(5.922,94.596) ; v1(13.767,84.734) 15.011,84.734 C37.2@15.037,84.709 ; v1(13.877,76.75) 13.894,76.733 15.037,76.733 C38.2@15.062,76.759 ; v1(18.136,89.078) 18.161,89.052 C39.2@18.161,87.859 ; v1(18.644,70.841) C47.2@18.644,71.958 ; C36.2@21.59,44.323 22.682,44.323 v1(22.962,44.044) ; L5.2@23.012,82.398 v1(23.012,83.795) ; v1(27.635,70.841) C51.2@27.635,71.907 ; v1(28.143,89.078) 28.143,87.859 C52.2@28.169,87.833 ; C44.1@30.556,82.144 30.556,83.185 v1(30.81,83.439) 30.81,84.684 C34.2@30.759,84.734 ; C50.2@30.963,75.743 30.988,75.768 v1(32.029,75.768) ; C30A.1@54.772,86.768 C29A.2@54.772,89.562 ; C30B.1@81.372,86.768 C29B.2@81.372,89.562 ; C30C.1@108.072,86.768 C29C.2@108.072,89.562 ; C30D.1@134.272,86.768 C29D.2@134.272,89.562 ; C27.2@4.652,94.088 5.414,94.088 v1(5.922,94.596)
  Bottom Layer (.GBL) w0.635: v1(42.037,13.716) 49.784,13.716 50.315,13.185 J5.PC06@50.315,11.502
pads on no net: J5.0 J5.4 J5.6 J5.8 J5.10 J5.14 J5.16 J5.18 J5.20 J5.23 J5.24 J5.25 J5.26 J5.27 J5.28 J5.29 J5.30 J5.33 J5.34 J5.35 J5.36 J5.37 J5.38 J5.39 J5.40 J5.44 J5.46 J5.48 J5.50 J5.55 J5.56 J5.57 J5.58 J5.59 J5.60 J5.61 J5.62 J5.65 J5.66 J5.67 J5.68 J5.69 J5.70 J5.71 J5.72 J5.75 J5.76 J5.77 J5.78 J5.79 J5.80 J5.82 J5.85 J5.86 J5.87 J5.88 J5.90 J5.91 J5.92 J5.95 J5.96 J5.97 J5.101 J5.107 J5.108 J5.109 J5.110 J5.111 J5.112 J5.113 J5.114 J5.117 J5.118 J5.119 J5.121 J5.122 J5.123 J5.124 J5.127 J5.128 J5.129 J5.130 J5.131 J5.132 J5.133 J5.134 J5.137 J5.139 J5.141 P1.6 P1.8 P1.10 P1.12 P1.14 P1.16 P1.18 P1.19 P1.20 P3.6 P3.7 P3.8 SW1.1 SW1.2 SW1.15 SW1.16 U1A.1 U1A.5 U1A.8 U1B.1 U1B.5 U1B.8 U1C.1 U1C.5 U1C.8 U1D.1 U1D.5 U1D.8 U4A.1 U4A.5 U4A.8 U4B.1 U4B.5 U4B.8 U4C.1 U4C.5 U4C.8 U4D.1 U4D.5 U4D.8 U5A.1 U5A.5 U5A.8 U5B.1 U5B.5 U5B.8 U5C.1 U5C.5 U5C.8 U5D.1 U5D.5 U5D.8 U6A.2 U6A.11 U6B.2 U6B.11 U6C.2 U6C.11 U6D.2 U6D.11 U7A.7 U7B.7 U7C.7 U7D.7 U8.1 U8.5 U8.7 U8.8 U9.1 U9.2 U9.3 U9.4 U9.5 U9.6 U9.16 U9.17 U9.20 U9.21 U9.22 U9.23 U9.24 U9.25 U9.26 U9.29 U9.30 U9.31 U9.32 U9.35 U9.38 U9.39 U9.40 U9.41 U9.42 U9.43 U9.44 U9.45 U9.46 U9.47 U9.48 U11A.4 U11A.5 U11B.4 U11B.5 U11C.4 U11C.5 U11D.4 U11D.5 U13A.4 U13A.5 U13B.4 U13B.5 U13C.4 U13C.5 U13D.4 U13D.5 U14.15 U14.24 U14.29 U14.30 U14.31 U14.32 U14.45 U14.48 U14.49 U14.50 U14.51 U14.52 U14.53 U14.55 U14.57 U14.58 U14.59 U14.60 U14.62 U14.63 U14.66 U14.67 U14.68 U14.69 U14.70 U14.71